# Altium PCB DC_Pump_Soft_Starter.PcbDoc
Units mm, origin at the board's own origin, x right, y up, seen from the top; angles counter-clockwise.
Board outline 42.8 x 22 mm, 2 copper layers (Top Layer, Bottom Layer), stack 1.57 mm thick; 9 components, 5 nets, 22 pads, 0 vias.
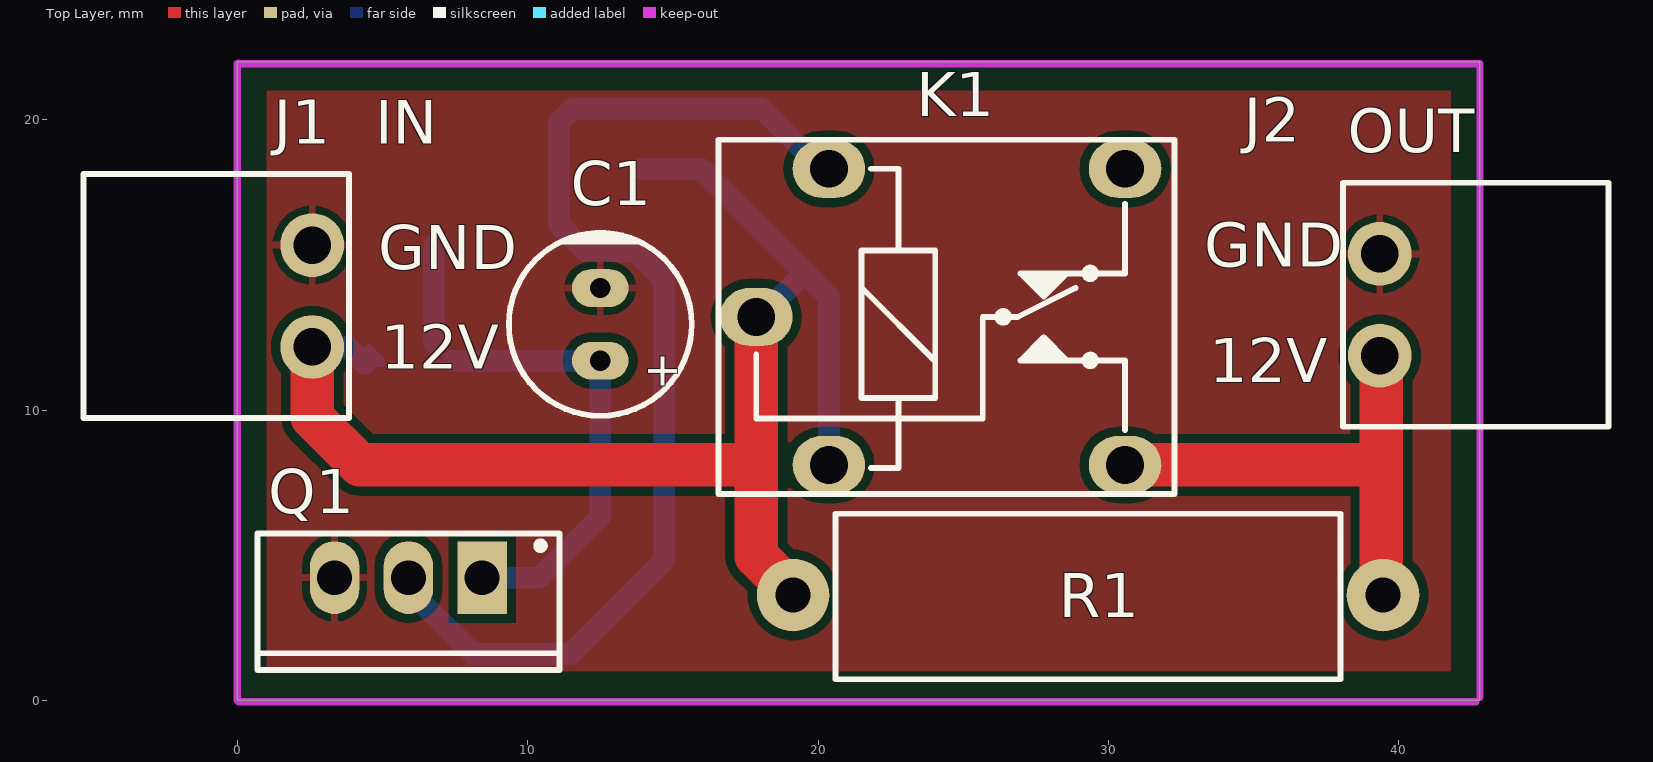
[diagram p0: Top Layer view]
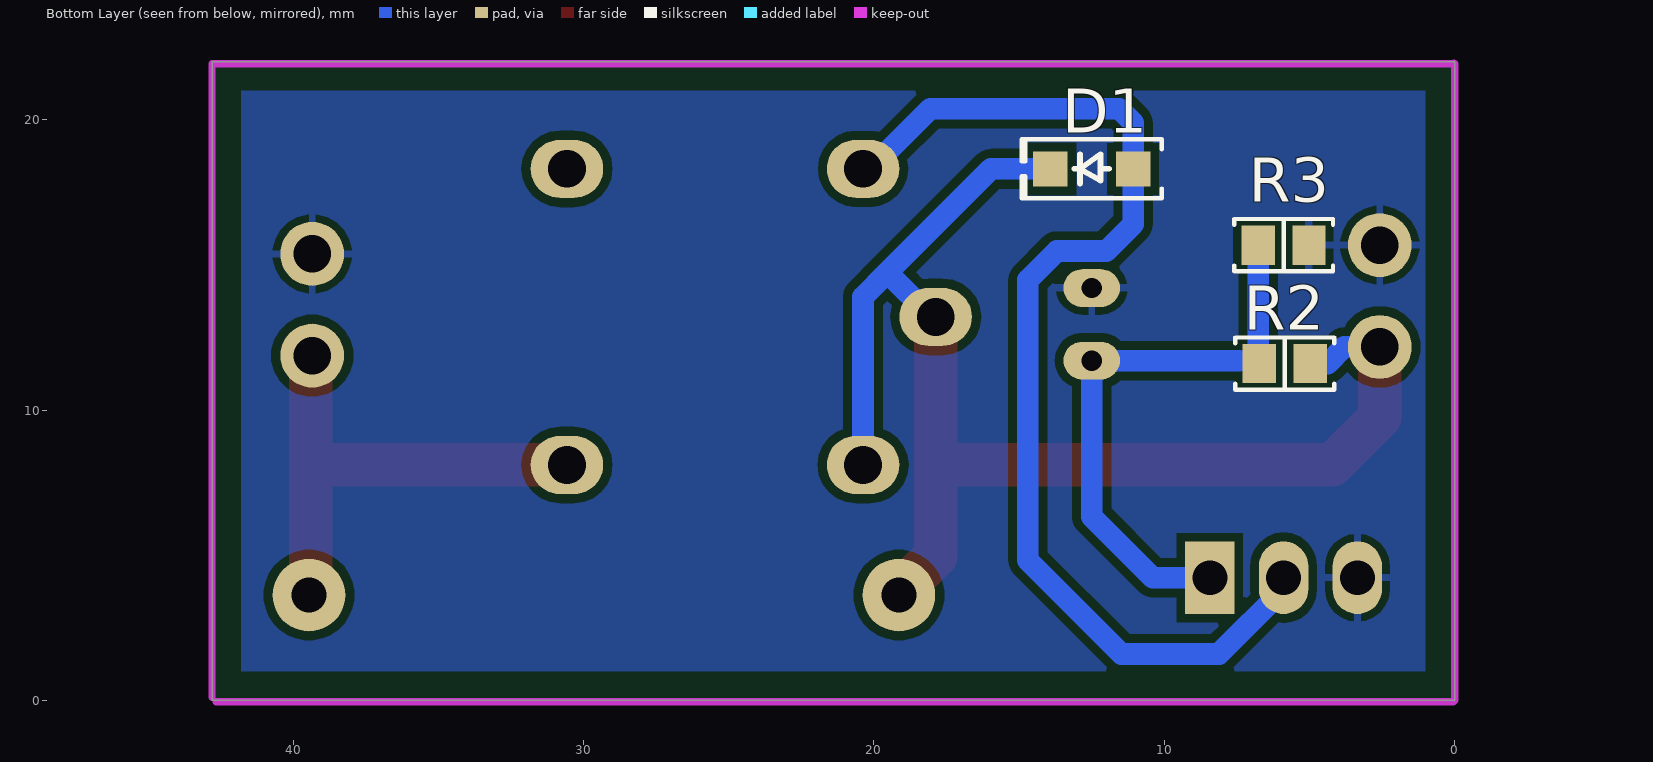
[diagram p1: Bottom Layer view, seen from below]
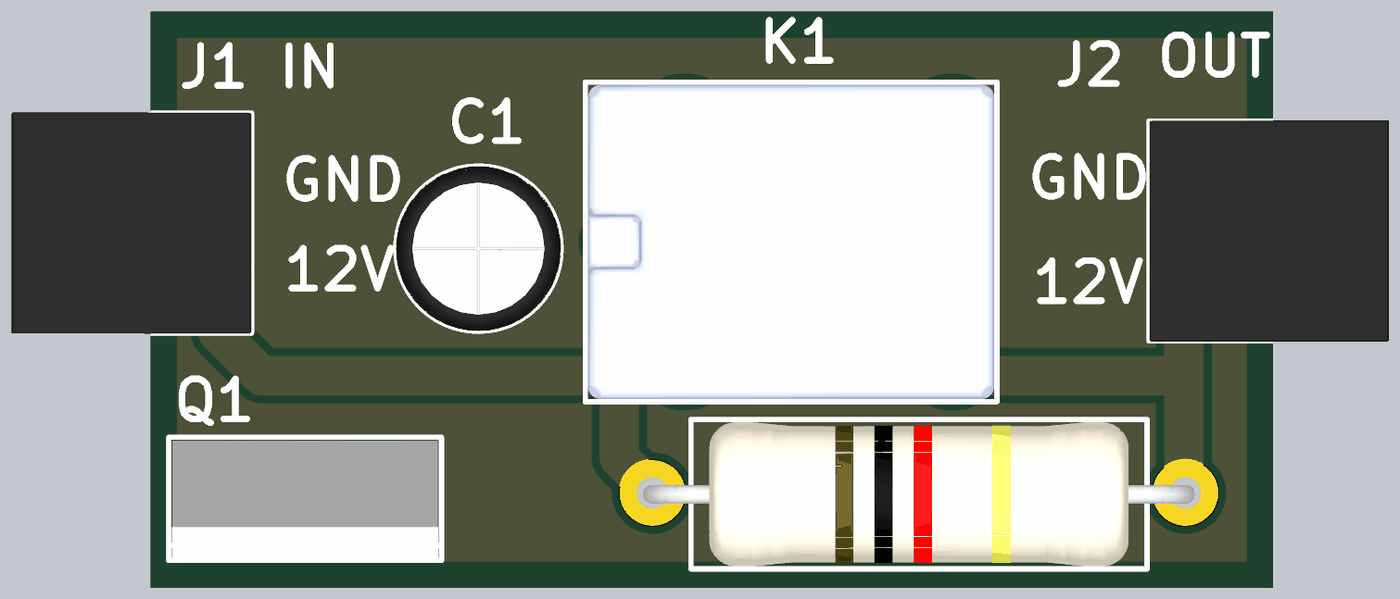
[diagram p2: 3D render of the assembled board from above, using the file's embedded part models]
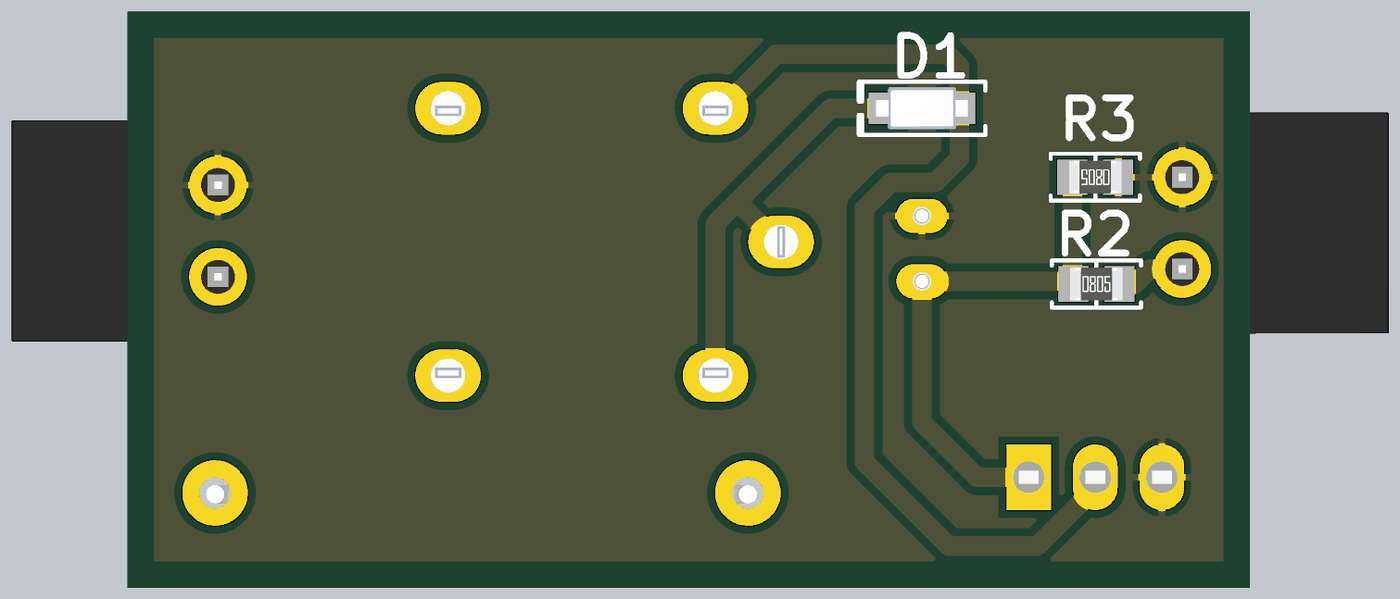
[diagram p3: 3D render of the assembled board from below, using the file's embedded part models]

## Layer stack, top to bottom
Top Solder: solder mask 0.0127, Solder Resist, Dk 3.8
Top Layer: signal copper 0.035
Dielectric: core 1.5, FR-4, Dk 4.5
Bottom Layer: signal copper 0.035
Bottom Solder: solder mask 0.0127, Solder Resist, Dk 3.8

## Board outline
0,0 0,22 42.8,22 42.8,0

## Design rules (kind name [scope] priority, off if disabled: settings)
AcuteAngle [All] p1: minimum=6.00000000000000E+0001 checktracksonly=TRUE
AssemblyTestPointUsage [(not InNetClass('NOTESTPOINTS'))] p1: allowmultiple=TRUE
AssemblyTestPointUsage AssemblyTestPointUsageN [InNetClass('NOTESTPOINTS')] p2: valid=2 allowmultiple=TRUE
AssemblyTestpoint [All] p1: testpointundercomponent=TRUE minsize=0.8 maxsize=2 preferedsize=1 minholesize=0 maxholesize=0.35 preferedholesize=0 testpointgrid=1.27 usegrid=FALSE gridoriginx=87.5 gridoriginy=62.5 gridtolerance=0 allowsidetop=TRUE minspacing=2.54 // Zollner
BoardOutlineClearance BoardCopperOutlineClearance [(OnLayer('Top Layer') OR OnLayer('Bottom Layer') )] p1: gap=0.5 ignorepadtopadclearanceinfootprint=FALSE except(1: Poly-OutlineEdge Region-OutlineEdge; 1.5: SMDPad-OutlineEdge THPad-OutlineEdge)
Clearance PadToViaClearance [IsVia and not IsComponentVia vs IsPad] p1: gap=0.025 ignorepadtopadclearanceinfootprint=TRUE
Clearance "Clearance NOTSELV-SELV" [InNetClass('NOTSELV') vs NOT InNetClass('NOTSELV')] p2: gap=6 ignorepadtopadclearanceinfootprint=FALSE // according to previous calio PCB
Clearance "Clearance (FAB)" [All] p3: gap=0.203 ignorepadtopadclearanceinfootprint=TRUE except(0.305: Arc-Poly Track-Poly SMDPad-Poly THPad-Poly Via-Poly Fill-Poly Poly-Poly)
ComponentClearance ComponentClearance_NetTie [((ObjectKind = 'Component') And (ComponentType = 'Net Tie')) Or (Footprint = 'StarPoint') Or (Footprint like 'NetTieVia*')] p1: gap=-3.81 collisioncheckmode=3 verticalgap=-3.81 showdistances=FALSE
ComponentClearance [All] p2: gap=0.254 collisioncheckmode=3 verticalgap=0.254 showdistances=FALSE
DiffPairsRouting [All] p1: maxlimit=1.27 minlimit=0.203 mostfreqgap=0.203 toplayer_minwidth=0.152 toplayer_maxwidth=2.54 toplayer_prefwidth=0.254 bottomlayer_minwidth=0.152 bottomlayer_maxwidth=2.54 bottomlayer_prefwidth=0.254 maxuncoupledlength=12.7
FabricationTestPointUsage [All] p1: valid=2 allowmultiple=FALSE
FabricationTestpoint [All] p1: side=3 testpointundercomponent=TRUE minsize=1.016 maxsize=2.54 preferedsize=1.524 minholesize=0 maxholesize=1.016 preferedholesize=0.813 testpointgrid=0.025 allowsidetop=TRUE allowsidebottom=TRUE usegrid=FALSE gridtolerance=0
HoleSize [All] p1: absolutevalues=TRUE maxlimit=6.35 minlimit=0.3 maxpercent=80.000 minpercent=20.000 // Zollner
HoleToHoleClearance HoleToHoleClearance_NetTieVia [InPadClass('NetTieVias') vs InPadClass('NetTieVias')] p1: gap=0 allowstackedmicrovias=TRUE
HoleToHoleClearance [All] p2: gap=0.25 allowstackedmicrovias=TRUE // Zollner
MinimumAnnularRing [All] p1: minimumring=0.15 // PCBWAY
MinimumSolderMaskSliver [All] p1: minsoldermaskwidth=0.2 // Zollner
PlaneClearance PlaneClearance_1 [All] p1: clearance=0.508
PlaneConnect [All] p1: pad.planeconnectstyle=Relief pad.reliefexpansion=0.508 pad.reliefentries=4 pad.reliefconductorwidth=0.254 pad.reliefairgap=0.254 via.planeconnectstyle=Direct via.reliefexpansion=0.508 via.reliefentries=4 via.reliefconductorwidth=0.254 via.reliefairgap=0.254
PolygonConnect [All] p1: thpad.connectstyle=Relief thpad.reliefconductorwidth=0.254 thpad.reliefentries=4 thpad.polygonreliefangle="90 Angle" thpad.airgapwidth=0.254 smdpad.connectstyle=Relief smdpad.reliefconductorwidth=0.254 smdpad.reliefentries=4 smdpad.polygonreliefangle="90 Angle" smdpad.airgapwidth=0.254 via.connectstyle=Direct via.reliefconductorwidth=0.254 via.reliefentries=4 via.polygonreliefangle="90 Angle" via.airgapwidth=0.254
RoutingVias [All] p1: holewidth=0.35 width=0.7 viastyle="Through Hole" minholewidth=0.3 minwidth=0.6 maxholewidth=1.27 maxwidth=1.27
SMDEntry [not IsTestpoint] p1: side=TRUE corner=TRUE anyangle=FALSE
SMDNeckDown [not IsTestpoint] p1: percent=90.000
SMDToCorner [All] p1: distance=10000
SMDToPlane [All] p1: distance=0
ShortCircuit [All vs not IsBoardCutoutRegion] p1: allowed=FALSE
SilkToSolderMaskClearance [IsPad] p1: minsilkscreentomaskgap=0.127 clearancetoexposedcopper=TRUE
SolderMaskExpansion [All] p1: expansion=0.05 istentingtop=FALSE // Zollner
SolderMaskExpansion SolderMaskExpansionToHoles [All] p2: expansion=0.1 istentingtop=FALSE soldermaskfromhole=TRUE // Zollner
UnRoutedNet [All] p1: checkbadconnections=TRUE
Width [All] p1: maxlimit=12.7 minlimit=0.203 preferedwidth=0.254
16 further rules are at their usual default settings.

## Components (designator, comment, footprint, x,y, rotation, side; value= is the part's Value field where it differs from the comment)
C1 "10uF/50V" "CAP TH ALUM ELEC D6.30mm S2.50mm H8.00mm" 12.5,12.95 r270 top value=10µF
D1 "1N4148W" SOD123F 12.5,18.307 r0 bottom
J1 "0395021002" "MOLEX 395021002" -0.725,13.925 r90 top
J2 "0395021002" "MOLEX 395021002" 42.65,13.625 r270 top
K1 "Relay 5pin Mini Milon 12V" REL_MILON_MINI 23.725,13.1 r90 top
Q1 "IRF540" TO-220-3 5.89,4.225 r180 top
R1 "3.3 1%" "RES TH 2W AXIAL-0.8" 29.3,3.625 r0 top value=3.3
R2 "100 kOhms" "RES 0805_2012" 5.85,11.6 r180 bottom
R3 "100 kOhms" "RES 0805_2012" 5.89,15.678 r0 bottom

## Footprints (in the part's own frame and the unit in brackets; to place one, negate y for a bottom-side part, rotate by r counter-clockwise, add the part's x,y. Pads: shape width x height; smd on the part's side, far side on the other; paste and mask are expansions set on the pad)
"CAP TH ALUM ELEC D6.30mm S2.50mm H8.00mm" [mm] "6.3mm Diameter 2.5mm Lead Spacing Aluminum Electrolytic Capacitors Radial, Can"
  oval 1.3x1.95 hole 0.7: 1(1.25,0) 2(-1.25,0)
  silkscreen extent -3.15,-3.15 3.15,3.15, body extent -3.16,-3.15 3.15,3.15, height 8
"MOLEX 395021002" [mil] "2 Position Terminal Block Header, Male Pins, 3.5mm Pitch,4.2x9.2mm Body, 90°, Right Angle, THT"
  round 86.61 hole 51: 1(-69,-130) 2(69,-130)
  silkscreen extent -165,-180 165,180, body extent -166,-180 166,180, height 280
REL_MILON_MINI [mm]
  oval 2x2.5 hole 1.3: 1(0.107,5.851) 2(5.207,-6.849) 3(-4.993,-6.849) 4(-4.993,3.351) 5(5.207,3.351)
  silkscreen extent -5.99,-8.55 6.21,7.15, body extent -5.89,-8.45 6.11,7.05, height 14
"RES 0805_2012" [mm] "Chip Resistor, 2-Leads, Body 2.00x1.25mm, IPC Medium Density"
  rect 1.15x1.35 smd: 1(-0.875,0) 2(0.875,0)
  silkscreen extent -1.7,-0.9 1.7,0.9, body extent -1,-0.62 1,0.63, height 0.6
"RES TH 2W AXIAL-0.8" [mm] "RESISTOR 2 WATT, AXIAL0.8"
  round 2.5 hole 1.2: 1(-10.16,0) 2(10.16,0)
  silkscreen extent -8.7,-2.9 8.7,2.8, body extent -10.51,-2.8 10.51,2.7, height 5.5
SOD123F [mm] "SODFL, 2-Leads, Body 1.60x3.50mm, IPC Medium Density"
  rect 1.2x1.2 smd: 1(-1.43,0) 2(1.43,0)
  silkscreen extent -2.41,-1.02 2.41,1.02, body extent -1.75,-0.8 1.75,0.8, height 1.1
TO-220-3 [mm] "TO, Thru-Hole, Vertical, Heatsink Mounted; 3 In-Line Leads; Pitch 2.54 mm"
  rect 1.7x2.5 hole 1.2: 1(-2.54,0)
  oval 1.7x2.5 hole 1.2: 2(0,0) 3(2.54,0)
  silkscreen extent -5.2,-1.52 5.2,3.18, body extent -5.08,-1.4 5.08,3.18, height 18.54

## Part data
C1: library part 106RSS050M, "CAP ALUM 10UF 20% 50V THRU HOLE", Capacitance=10µF, Device Package="Radial, Can", ESR (Equivalent Series Resistance)="16.579Ohm @ 120Hz", Lifetime @ Temp.="1000 Hrs @ 85°C", manufacturer="Illinois Capacitor", Operating Temperature="-40°C ~ 85°C", Ripple Current @ High Frequency="70mA @ 100kHz", Ripple Current @ Low Frequency="50mA @ 120Hz", Supplier Part Number 1=1572-1291-ND, Tolerance=±20%, Voltage - Rated=50V, Applications="General Purpose", componentlink1description=Datasheet, componentlink1url=http://www.illinoiscapacitor.com/pdf/seriesDocuments/RSS%20series.pdf, componentlink2description="DigiKey Link", componentlink2url=http://digikey.com/product-detail/en/illinois-capacitor/106RSS050M/1572-1291-ND/5410679, Height - Seated (Max)="0.315\" (8.00mm)", lastupdated="4.9.2020 г. 23:28:56", Lead Spacing="0.098\" (2.50mm)", Lifecycle Status=Active, Minimum Order=1, Mounting Type="Through Hole", Package / Case="Radial, Can", packaging=Bulk, Part Number=106RSS050M, Part Status=Active, partid=21108, Polarization=Polar, price=0.31, series=RSS, Size / Dimension="0.248\" Dia (6.30mm)", Supplier 1=DigiKey
D1: library part 1N4007FLTR, "SOD-123 SMD", Capacitance @ Vr, F="15pF @ 4V, 1MHz", Current - Average Rectified (Io)=1A, Current - Reverse Leakage @ Vr="5µA @ 1000V", manufacturer="SMC Diode Solutions", Package / Case=SOD-123F, Supplier Device Package=SOD-123FL, Supplier Part Number 1=1655-1N4007FLCT-ND, Voltage - DC Reverse (Vr) (Max)=1000V, Voltage - Forward (Vf) (Max) @ If="1.1V @ 1A", componentlink1description=Datasheet, componentlink1url=http://www.smc-diodes.com/propdf/1N4001FL-1N4007FL%20N1646%20REV.A.pdf, componentlink2description="DigiKey Link", componentlink2url=http://digikey.com/product-detail/en/smc-diode-solutions/1N4007FLTR/1655-1N4007FLCT-ND/11657827, Diode Type=Standard, lastupdated="30.8.2020 г. 20:59:55", Lifecycle Status=Active, Minimum Order=1, Mounting Type="Surface Mount", packaging=TapeAndReel, Part Number=1N4148W, partid=3314, price=0.01, Speed="Standard Recovery >500ns, > 200mA (Io)", Supplier 1=DigiKey
J1 J2: "TERM BLOCK HDR 2POS 90DEG 3.5MM", Color=Black, Current - UL=8A, manufacturer=Molex, Operating Temperature="-40°C ~ 105°C", Supplier Part Number 1=WM7770-ND, Voltage - UL=300V, componentlink1description=Datasheet, componentlink1url=https://www.molex.com/pdm_docs/sd/395021002_sd.pdf, componentlink2description="DigiKey Link", componentlink2url=http://digikey.com/product-detail/en/molex/0395021002/WM7770-ND/1280621, Contact Mating Finish=Tin, Header Orientation="90°, Right Angle", lastupdated="25.6.2020 г. 15:44:05", Lifecycle Status=Active, Minimum Order=1, Mounting Type="Through Hole", Number of Levels=1, Number of Positions=2, packaging=Tray, Part Number=0395021002, Part Status=Active, Pitch="0.138\" (3.50mm)", Positions Per Level=2, price=0.58, series="Eurostyle ESE 39502", Supplier 1=DigiKey, Termination Style=Solder, Type="Header, Male Pins, Shrouded (4 Side)"
K1: "TRKM S-Z L 12VDC", PartNumber="TRKM S-Z L12VDC", componentlink1description=https://www.aliexpress.com/item/1005004478770960.html?spm=a2g0o.order_list.order_list_main.5.56c11802IdLJ6g
Q1: library part "IRFZ44 (THD)", "N-Channel 100V 33A (Tc) 94W (Tc) Through Hole TO-220AB", PartNumber=IRF540
R1: library part "Res TH 2W AXIAL-0.8", "TH Resistor"
R2 R3: library part CHP0805AFX-1003ELF, "RESHIGHPOWERA 0805 100K 1% 1/2W", Device Package="0805 (2012 Metric)", manufacturer="Bourns Inc.", Operating Temperature="-55°C ~ 155°C", Power (Watts)="0.5W, 1/2W", Ratings=AEC-Q200, Supplier Device Package=0805, Supplier Part Number 1=118-CHP0805AFX-1003ELFCT-ND, Temperature Coefficient=±100ppm/°C, Tolerance=±1%, componentlink1description=Datasheet, componentlink1url=https://www.bourns.com/docs/product-datasheets/chp-a.pdf, componentlink2description="DigiKey Link", componentlink2url=https://www.digikey.com/en/products/detail/bourns-inc/CHP0805AFX-1003ELF/12144391, Composition="Thick Film", Features="Anti-Sulfur, Automotive AEC-Q200, Moisture Resistant, Pulse Withstanding", Height - Seated (Max)="0.024\" (0.60mm)", lastupdated="24.11.2023 г. 21:00:30", Lifecycle Status=Active, Minimum Order=1, Number of Terminations=2, Package / Case="0805 (2012 Metric)", packaging=TapeAndReel, Part Number=CHP0805AFX-1003ELF, Part Status=Active, partid=61757, price=0.06, Resistance="100 kOhms", series=CHP-A, Size / Dimension="0.079\" L x 0.049\" W (2.00mm x 1.25mm)", Supplier 1=DigiKey

## Nets (pads, with @x,y where several pads share a name; then routed paths per layer and width w, separated by ;. In a path a pad name is that pad's centre, name@x,y a point inside that pad or via, vN(x,y) a via of type N, cw(c..) or ccw(c..) an arc to the next point about the centre after c; other vN are vias at no path point)
12VDC_IN: D1.2 J1.1 K1.1 K1.4 R1.1 R2.2 | length 48.4
  Top Layer w1.5: J1.1 2.577,9.748 4.218,8.107 17.874,8.107 ; K1.1 17.874,8.107 ; R1.1@19.214,3.625 17.874,4.965 17.874,8.107
  Bottom Layer w0.254: 4.375,11.6 R2.2 4.975,11.7 R2.2@4.527,12.148 ; K1.1@17.986,13.319 K1.1 K1.1@18.008,13.207
  Bottom Layer w0.75: J1.1 3.802,12.172 4.375,11.6 ; D1.2 15.968,18.307 19.538,14.737 ; K1.1@18.008,13.207 19.538,14.737 ; K1.4 20.374,13.901 19.538,14.737
12VDC_OUT: J2.2 K1.3 R1.2 | length 17.1
  Top Layer w0.254: J2.2 J2.2@39.404,11.816 ; R1.2@39.404,3.681 R1.2
  Top Layer w1.5: K1.3 39.404,8.107 ; R1.2@39.404,3.681 39.404,8.107 ; J2.2@39.404,11.816 39.404,8.107
GND: C1.2 J1.2 J2.1 Q1.3 R3.1
NetC1_1: C1.1 Q1.1 R2.1 R3.2 | length 20.2
  Bottom Layer w0.254: 6.765,12.34 6.725,12.3 R2.1 7.325,11.6 7.425,11.7
  Bottom Layer w0.75: 6.765,12.34 R3.2 ; 7.425,11.7 C1.1 12.5,6.325 10.4,4.225 Q1.1
NetD1_1: D1.1 K1.5 Q1.2 | length 39.4
  Bottom Layer w0.254: Q1.2@5.89,3.825 Q1.2 ; K1.5@20.124,18.307 K1.5
  Bottom Layer w0.75: Q1.2@5.89,3.825 8.115,1.6 11.475,1.6 14.7,4.825 14.7,14.475 13.7,15.475 12,15.475 11.07,16.405 D1.1 11.07,19.895 11.55,20.375 18.056,20.375 K1.5@20.124,18.307
pads on no net: K1.2

## Polygon pours and split planes (outlines as drawn)
GND on Top Layer "NONET_L-01_P-001" (solid, pour order 2): 0.1,21.85 0.175,21.925 42.7,21.925 42.7,0.05 42.675,0.025 42.65,0.05 0.075,0.05 0.075,21.9 0.1,21.925
GND on Bottom Layer "NONET_L-01_P-001" (solid, pour order 3): 0.05,21.95 0.1,22 42.75,22 42.75,0.05 42.725,0.025 0,0.025 0,21.925 0.025,21.95

## Keep-outs
Keep-Out Layer:
  lines w0.254: 0,0 0,21.925 ; 0.025,21.95 0,21.925 ; 0.05,-0.05 42.65,-0.05 ; 42.8,0.1 42.8,21.925 0,21.925

## Silkscreen, mask and mechanical layers (free items; w line width, h text height)
Top Overlay:
  text "IN" at 4.754,19.179 h1.5
  text "OUT" at 38.25,18.875 h1.5
  text "GND" at 33.304,14.932 h1.52
  text "GND" at 4.854,14.854 h1.52
  text "12V" at 4.929,11.429 h1.52
  text "12V" at 33.479,10.954 h1.52

## Text inside footprints (layer, text, board x,y; h text height)
C1: Top Overlay "+" at 13.75,12 h2 r270